# EAGLE board Micro-OLED-Breakout-Panel-v04 (EAGLE 6.6.0), part 1 of 3
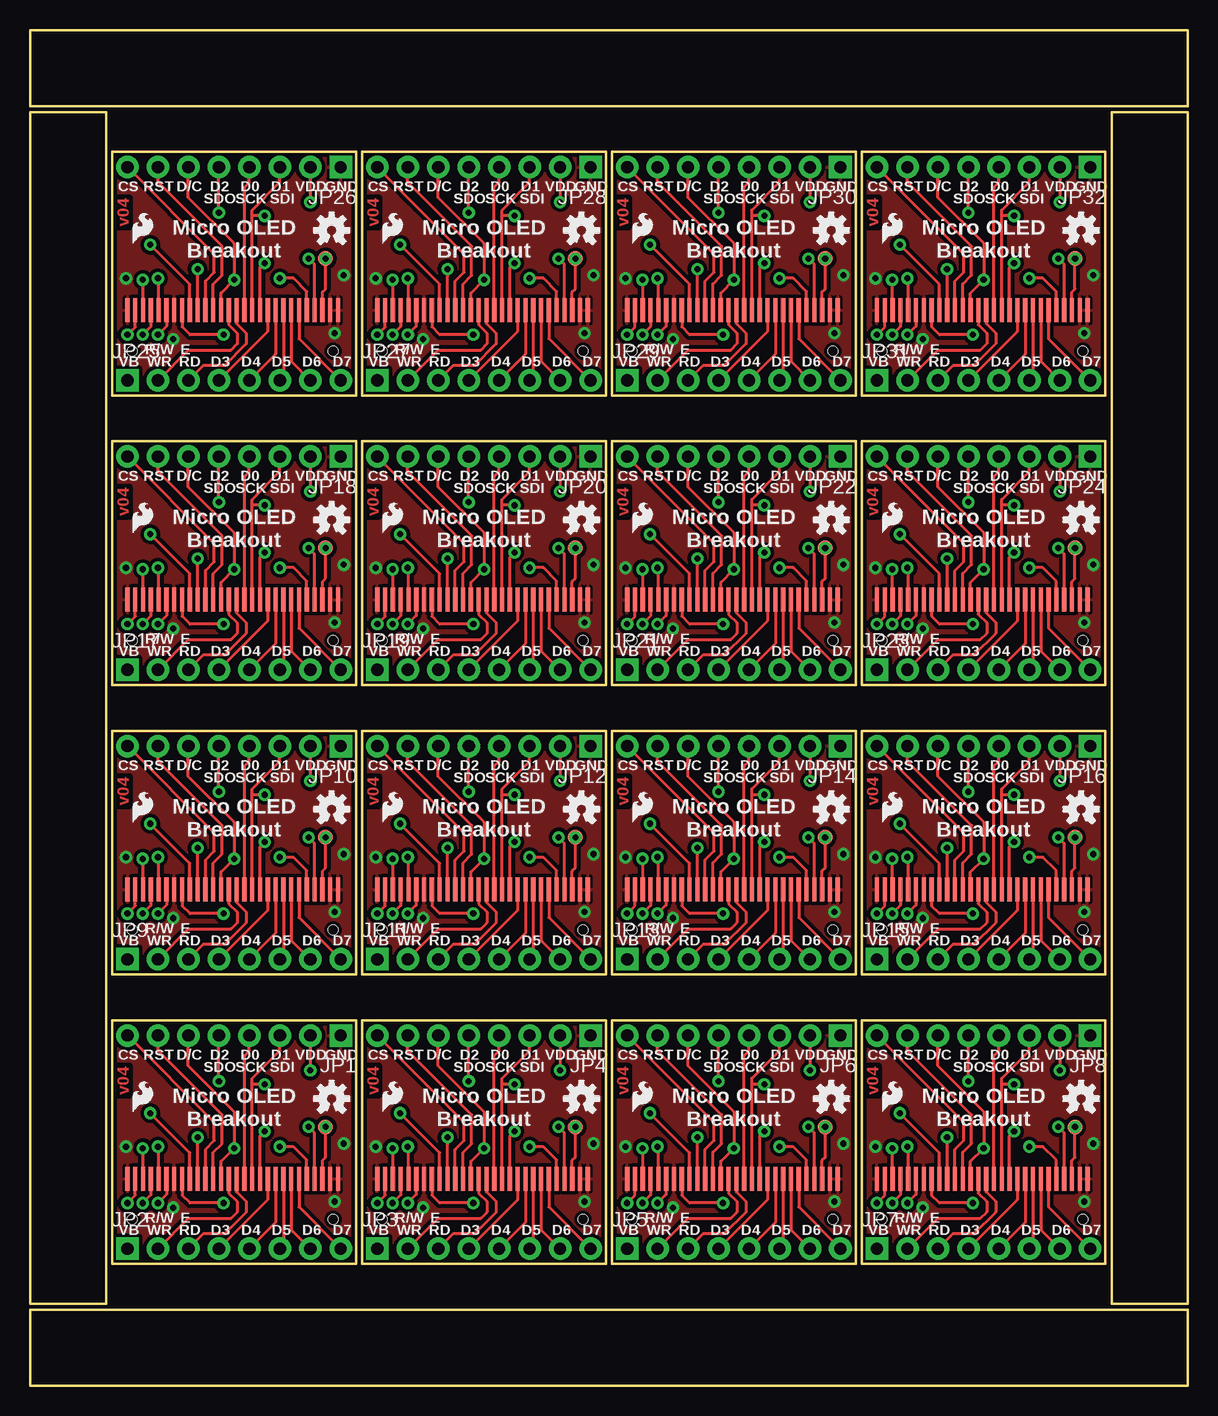
[diagram p0: board, top side]
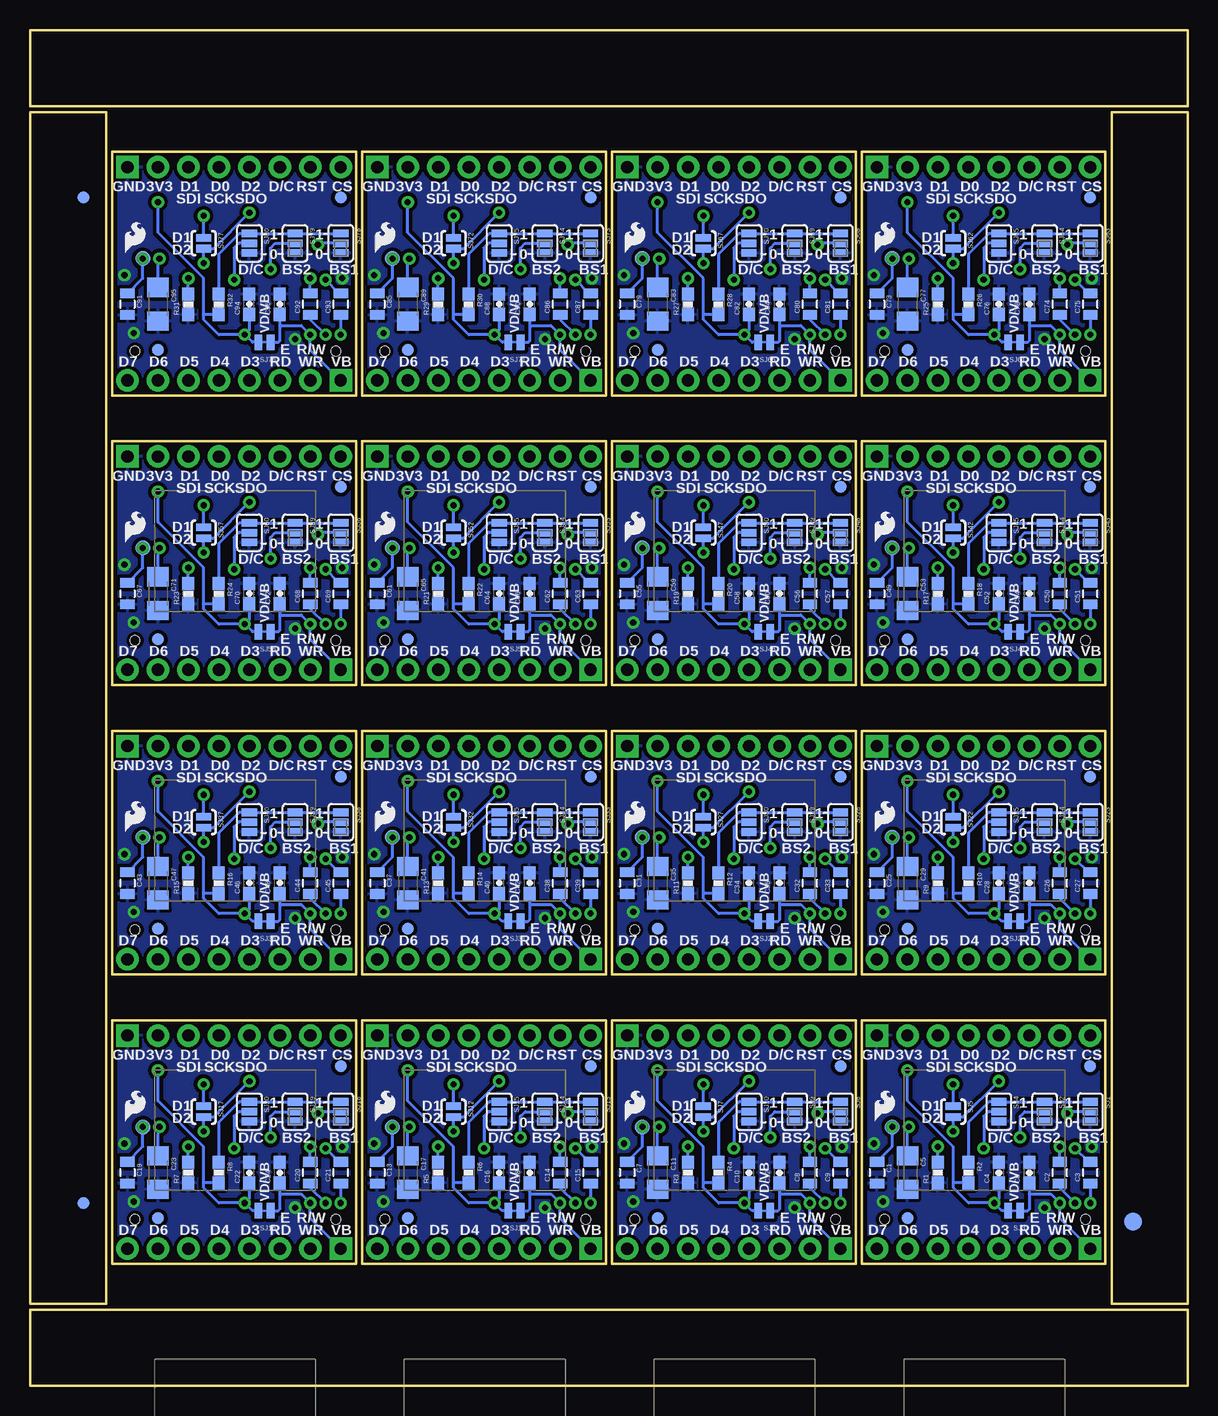
[diagram p1: board, bottom side, seen from below]

Size 96.52 x 113.03 mm. Coordinates in mm from the lower left corner, seen from the top.
Outline: 6.35,82.55 6.35,6.86 0,6.86 0,33.02
Outline: 79.25,0 0,0 0,6.35 29.72,6.35
Outline: 17.02,6.35 96.52,6.35 96.52,0 66.55,0
Outline: 96.52,82.55 96.52,6.86 90.17,6.86 90.17,33.02
Outline: 0,30.48 0,106.17 6.35,106.17 6.35,80.01
Outline: 79.25,106.68 0,106.68 0,113.03 29.72,113.03
Outline: 17.02,113.03 96.52,113.03 96.52,106.68 66.55,106.68
Outline: 90.17,30.48 90.17,106.17 96.52,106.17 96.52,80.01
Outline: 6.86,10.16 6.86,30.48 27.18,30.48 27.18,10.16 6.86,10.16
Outline: 27.69,10.16 27.69,30.48 48.01,30.48 48.01,10.16 27.69,10.16
Outline: 48.51,10.16 48.51,30.48 68.83,30.48 68.83,10.16 48.51,10.16
Outline: 69.34,10.16 69.34,30.48 89.66,30.48 89.66,10.16 69.34,10.16
Outline: 6.86,34.29 6.86,54.61 27.18,54.61 27.18,34.29 6.86,34.29
Outline: 27.69,34.29 27.69,54.61 48.01,54.61 48.01,34.29 27.69,34.29
Outline: 48.51,34.29 48.51,54.61 68.83,54.61 68.83,34.29 48.51,34.29
Outline: 69.34,34.29 69.34,54.61 89.66,54.61 89.66,34.29 69.34,34.29
Outline: 6.86,58.42 6.86,78.74 27.18,78.74 27.18,58.42 6.86,58.42
Outline: 27.69,58.42 27.69,78.74 48.01,78.74 48.01,58.42 27.69,58.42
Outline: 48.51,58.42 48.51,78.74 68.83,78.74 68.83,58.42 48.51,58.42
Outline: 69.34,58.42 69.34,78.74 89.66,78.74 89.66,58.42 69.34,58.42
Outline: 6.86,82.55 6.86,102.87 27.18,102.87 27.18,82.55 6.86,82.55
Outline: 27.69,82.55 27.69,102.87 48.01,102.87 48.01,82.55 27.69,82.55
Outline: 48.51,82.55 48.51,102.87 68.83,102.87 68.83,82.55 48.51,82.55
Outline: 69.34,82.55 69.34,102.87 89.66,102.87 89.66,82.55 69.34,82.55
Copper layers (1*16): Top 0.035mm / dielectric 1.5mm / Bottom 0.035mm
Design rules "SparkFun-2-layer": minimum track width 7mil, minimum drill 15mil, track to track 8mil, track to pad 8mil, pad to pad 8mil, via to via 8mil, smd to smd 8mil, copper to edge 8mil, drill to drill 8mil, minimum pad ring 12mil, minimum via ring 10mil, stop-mask expansion 4mil, vias tented up to drill 20mil, thermal gap 10mil

## Footprints (pad centres in the part's own frame; a part is rotated, then mirrored left to right if it is on the bottom)
0805 = smd 0.8 x 1.2: 1 -0.9,0; 2 0.9,0
0603-CAP = smd 1.1 x 1: 1 -0.85,0; 2 0.85,0
1206 = smd 1.6 x 1.8: 1 -1.4,0; 2 1.4,0
FIDUCIAL-1.5X3 = smd 1.5 x 1.5: 1 0,0
FIDUCIAL-1X2 = smd 1 x 1: 1 0,0
1X08_PIN1_NO_SILK = drill 1.016 pad 1.88 square: 1 0,0 | drill 1.016 pad 1.88: 2 2.54,0; 3 5.08,0; 4 7.62,0; 5 10.16,0; 6 12.7,0; 7 15.24,0; 8 17.78,0
OLED-0.66-64X48 = smd 0.35 x 2: 1 0,0; 2 0.65,0; 3 1.3,0; 4 1.95,0; 5 2.6,0; 6 3.25,0; 7 3.9,0; 8 4.55,0; 9 5.2,0; 10 5.85,0; 11 6.5,0; 12 7.15,0; 13 7.8,0; 14 8.45,0; 15 9.1,0; 16 9.75,0; 17 10.4,0; 18 11.05,0; 19 11.7,0; 20 12.35,0; 21 13,0; 22 13.65,0; 23 14.3,0; 24 14.95,0; 25 15.6,0; 26 16.25,0; 27 16.9,0; 28 17.55,0 | hole 0.8: 17.15,-3.4; 0.4,-3.4
0603-RES = smd 1.1 x 1: 1 -0.85,0; 2 0.85,0
PAD-JUMPER-3-2OF3_NC_BY_PASTE_YES_SILK_FULL_BOX = smd 0.635 x 1.27: 1 -0.813,0; 2 0,0; 3 0.813,0
PAD-JUMPER-2-NC_BY_TRACE_NO_SILK = smd 0.635 x 1.27: 1 -0.508,0; 2 0.508,0
PAD-JUMPER-3-NO-TIGHT = smd 0.635 x 1.27: 1 -0.813,0; 2 0,0; 3 0.813,0
PAD-JUMPER-2-NO_YES_SILK = smd 0.635 x 1.27: 1 -0.45,0; 2 0.45,0
PAD.03X.05 = smd 1.27 x 1.27: P$1 0,0

## Placement (x,y rotation side)
C1  2.2uF  [0805]  25.91,17.78 270 bottom
C2  1uF X5R  [0805]  10.67,17.78 90 bottom
C3  1uF X5R  [0805]  8.13,17.78 90 bottom
C4  1uF  [0603-CAP]  15.75,17.78 90 bottom
C5  4.7uF/16V  [1206]  23.37,17.78 270 bottom
C6  1uF  [0603-CAP]  13.21,17.78 90 bottom
C7  2.2uF  [0805]  46.74,17.78 270 bottom
C8  1uF X5R  [0805]  31.5,17.78 90 bottom
C9  1uF X5R  [0805]  28.96,17.78 90 bottom
C10  1uF  [0603-CAP]  36.58,17.78 90 bottom
C11  4.7uF/16V  [1206]  44.2,17.78 270 bottom
C12  1uF  [0603-CAP]  34.04,17.78 90 bottom
C13  2.2uF  [0805]  67.56,17.78 270 bottom
C14  1uF X5R  [0805]  52.32,17.78 90 bottom
C15  1uF X5R  [0805]  49.78,17.78 90 bottom
C16  1uF  [0603-CAP]  57.4,17.78 90 bottom
C17  4.7uF/16V  [1206]  65.02,17.78 270 bottom
C18  1uF  [0603-CAP]  54.86,17.78 90 bottom
C19  2.2uF  [0805]  88.39,17.78 270 bottom
C20  1uF X5R  [0805]  73.15,17.78 90 bottom
C21  1uF X5R  [0805]  70.61,17.78 90 bottom
C22  1uF  [0603-CAP]  78.23,17.78 90 bottom
C23  4.7uF/16V  [1206]  85.85,17.78 270 bottom
C24  1uF  [0603-CAP]  75.69,17.78 90 bottom
C25  2.2uF  [0805]  25.91,41.91 270 bottom
C26  1uF X5R  [0805]  10.67,41.91 90 bottom
C27  1uF X5R  [0805]  8.13,41.91 90 bottom
C28  1uF  [0603-CAP]  15.75,41.91 90 bottom
C29  4.7uF/16V  [1206]  23.37,41.91 270 bottom
C30  1uF  [0603-CAP]  13.21,41.91 90 bottom
C31  2.2uF  [0805]  46.74,41.91 270 bottom
C32  1uF X5R  [0805]  31.5,41.91 90 bottom
C33  1uF X5R  [0805]  28.96,41.91 90 bottom
C34  1uF  [0603-CAP]  36.58,41.91 90 bottom
C35  4.7uF/16V  [1206]  44.2,41.91 270 bottom
C36  1uF  [0603-CAP]  34.04,41.91 90 bottom
C37  2.2uF  [0805]  67.56,41.91 270 bottom
C38  1uF X5R  [0805]  52.32,41.91 90 bottom
C39  1uF X5R  [0805]  49.78,41.91 90 bottom
C40  1uF  [0603-CAP]  57.4,41.91 90 bottom
C41  4.7uF/16V  [1206]  65.02,41.91 270 bottom
C42  1uF  [0603-CAP]  54.86,41.91 90 bottom
C43  2.2uF  [0805]  88.39,41.91 270 bottom
C44  1uF X5R  [0805]  73.15,41.91 90 bottom
C45  1uF X5R  [0805]  70.61,41.91 90 bottom
C46  1uF  [0603-CAP]  78.23,41.91 90 bottom
C47  4.7uF/16V  [1206]  85.85,41.91 270 bottom
C48  1uF  [0603-CAP]  75.69,41.91 90 bottom
C49  2.2uF  [0805]  25.91,66.04 270 bottom
C50  1uF X5R  [0805]  10.67,66.04 90 bottom
C51  1uF X5R  [0805]  8.13,66.04 90 bottom
C52  1uF  [0603-CAP]  15.75,66.04 90 bottom
C53  4.7uF/16V  [1206]  23.37,66.04 270 bottom
C54  1uF  [0603-CAP]  13.21,66.04 90 bottom
C55  2.2uF  [0805]  46.74,66.04 270 bottom
C56  1uF X5R  [0805]  31.5,66.04 90 bottom
C57  1uF X5R  [0805]  28.96,66.04 90 bottom
C58  1uF  [0603-CAP]  36.58,66.04 90 bottom
C59  4.7uF/16V  [1206]  44.2,66.04 270 bottom
C60  1uF  [0603-CAP]  34.04,66.04 90 bottom
C61  2.2uF  [0805]  67.56,66.04 270 bottom
C62  1uF X5R  [0805]  52.32,66.04 90 bottom
C63  1uF X5R  [0805]  49.78,66.04 90 bottom
C64  1uF  [0603-CAP]  57.4,66.04 90 bottom
C65  4.7uF/16V  [1206]  65.02,66.04 270 bottom
C66  1uF  [0603-CAP]  54.86,66.04 90 bottom
C67  2.2uF  [0805]  88.39,66.04 270 bottom
C68  1uF X5R  [0805]  73.15,66.04 90 bottom
C69  1uF X5R  [0805]  70.61,66.04 90 bottom
C70  1uF  [0603-CAP]  78.23,66.04 90 bottom
C71  4.7uF/16V  [1206]  85.85,66.04 270 bottom
C72  1uF  [0603-CAP]  75.69,66.04 90 bottom
C73  2.2uF  [0805]  25.91,90.17 270 bottom
C74  1uF X5R  [0805]  10.67,90.17 90 bottom
C75  1uF X5R  [0805]  8.13,90.17 90 bottom
C76  1uF  [0603-CAP]  15.75,90.17 90 bottom
C77  4.7uF/16V  [1206]  23.37,90.17 270 bottom
C78  1uF  [0603-CAP]  13.21,90.17 90 bottom
C79  2.2uF  [0805]  46.74,90.17 270 bottom
C80  1uF X5R  [0805]  31.5,90.17 90 bottom
C81  1uF X5R  [0805]  28.96,90.17 90 bottom
C82  1uF  [0603-CAP]  36.58,90.17 90 bottom
C83  4.7uF/16V  [1206]  44.2,90.17 270 bottom
C84  1uF  [0603-CAP]  34.04,90.17 90 bottom
C85  2.2uF  [0805]  67.56,90.17 270 bottom
C86  1uF X5R  [0805]  52.32,90.17 90 bottom
C87  1uF X5R  [0805]  49.78,90.17 90 bottom
C88  1uF  [0603-CAP]  57.4,90.17 90 bottom
C89  4.7uF/16V  [1206]  65.02,90.17 270 bottom
C90  1uF  [0603-CAP]  54.86,90.17 90 bottom
C91  2.2uF  [0805]  88.39,90.17 270 bottom
C92  1uF X5R  [0805]  73.15,90.17 90 bottom
C93  1uF X5R  [0805]  70.61,90.17 90 bottom
C94  1uF  [0603-CAP]  78.23,90.17 90 bottom
C95  4.7uF/16V  [1206]  85.85,90.17 270 bottom
C96  1uF  [0603-CAP]  75.69,90.17 90 bottom
E$1  [FIDUCIAL-1.5X3]  4.57,13.72 0 bottom
E$4  [FIDUCIAL-1X2]  92.08,15.24 0 bottom
E$8  [FIDUCIAL-1X2]  92.08,99.06 180 bottom
FID1  FIDUCIAL1X2  [FIDUCIAL-1X2]  23.37,13.97 0 bottom
FID2  FIDUCIAL1X2  [FIDUCIAL-1X2]  8.13,26.67 0 bottom
FID3  FIDUCIAL1X2  [FIDUCIAL-1X2]  44.2,13.97 0 bottom
FID4  FIDUCIAL1X2  [FIDUCIAL-1X2]  28.96,26.67 0 bottom
FID5  FIDUCIAL1X2  [FIDUCIAL-1X2]  65.02,13.97 0 bottom
FID6  FIDUCIAL1X2  [FIDUCIAL-1X2]  49.78,26.67 0 bottom
FID7  FIDUCIAL1X2  [FIDUCIAL-1X2]  85.85,13.97 0 bottom
FID8  FIDUCIAL1X2  [FIDUCIAL-1X2]  70.61,26.67 0 bottom
FID9  FIDUCIAL1X2  [FIDUCIAL-1X2]  23.37,38.1 0 bottom
FID10  FIDUCIAL1X2  [FIDUCIAL-1X2]  8.13,50.8 0 bottom
FID11  FIDUCIAL1X2  [FIDUCIAL-1X2]  44.2,38.1 0 bottom
FID12  FIDUCIAL1X2  [FIDUCIAL-1X2]  28.96,50.8 0 bottom
FID13  FIDUCIAL1X2  [FIDUCIAL-1X2]  65.02,38.1 0 bottom
FID14  FIDUCIAL1X2  [FIDUCIAL-1X2]  49.78,50.8 0 bottom
FID15  FIDUCIAL1X2  [FIDUCIAL-1X2]  85.85,38.1 0 bottom
FID16  FIDUCIAL1X2  [FIDUCIAL-1X2]  70.61,50.8 0 bottom
FID17  FIDUCIAL1X2  [FIDUCIAL-1X2]  23.37,62.23 0 bottom
FID18  FIDUCIAL1X2  [FIDUCIAL-1X2]  8.13,74.93 0 bottom
FID19  FIDUCIAL1X2  [FIDUCIAL-1X2]  44.2,62.23 0 bottom
FID20  FIDUCIAL1X2  [FIDUCIAL-1X2]  28.96,74.93 0 bottom
FID21  FIDUCIAL1X2  [FIDUCIAL-1X2]  65.02,62.23 0 bottom
FID22  FIDUCIAL1X2  [FIDUCIAL-1X2]  49.78,74.93 0 bottom
FID23  FIDUCIAL1X2  [FIDUCIAL-1X2]  85.85,62.23 0 bottom
FID24  FIDUCIAL1X2  [FIDUCIAL-1X2]  70.61,74.93 0 bottom
FID25  FIDUCIAL1X2  [FIDUCIAL-1X2]  23.37,86.36 0 bottom
FID26  FIDUCIAL1X2  [FIDUCIAL-1X2]  8.13,99.06 0 bottom
FID27  FIDUCIAL1X2  [FIDUCIAL-1X2]  44.2,86.36 0 bottom
FID28  FIDUCIAL1X2  [FIDUCIAL-1X2]  28.96,99.06 0 bottom
FID29  FIDUCIAL1X2  [FIDUCIAL-1X2]  65.02,86.36 0 bottom
FID30  FIDUCIAL1X2  [FIDUCIAL-1X2]  49.78,99.06 0 bottom
FID31  FIDUCIAL1X2  [FIDUCIAL-1X2]  85.85,86.36 0 bottom
FID32  FIDUCIAL1X2  [FIDUCIAL-1X2]  70.61,99.06 0 bottom
JP1  [1X08_PIN1_NO_SILK]  25.91,29.21 180 top
JP2  [1X08_PIN1_NO_SILK]  8.13,11.43 0 top
JP3  [1X08_PIN1_NO_SILK]  28.96,11.43 0 top
JP4  [1X08_PIN1_NO_SILK]  46.74,29.21 180 top
JP5  [1X08_PIN1_NO_SILK]  49.78,11.43 0 top
JP6  [1X08_PIN1_NO_SILK]  67.56,29.21 180 top
JP7  [1X08_PIN1_NO_SILK]  70.61,11.43 0 top
JP8  [1X08_PIN1_NO_SILK]  88.39,29.21 180 top
JP9  [1X08_PIN1_NO_SILK]  8.13,35.56 0 top
JP10  [1X08_PIN1_NO_SILK]  25.91,53.34 180 top
JP11  [1X08_PIN1_NO_SILK]  28.96,35.56 0 top
JP12  [1X08_PIN1_NO_SILK]  46.74,53.34 180 top
JP13  [1X08_PIN1_NO_SILK]  49.78,35.56 0 top
JP14  [1X08_PIN1_NO_SILK]  67.56,53.34 180 top
JP15  [1X08_PIN1_NO_SILK]  70.61,35.56 0 top
JP16  [1X08_PIN1_NO_SILK]  88.39,53.34 180 top
JP17  [1X08_PIN1_NO_SILK]  8.13,59.69 0 top
JP18  [1X08_PIN1_NO_SILK]  25.91,77.47 180 top
JP19  [1X08_PIN1_NO_SILK]  28.96,59.69 0 top
JP20  [1X08_PIN1_NO_SILK]  46.74,77.47 180 top
JP21  [1X08_PIN1_NO_SILK]  49.78,59.69 0 top
JP22  [1X08_PIN1_NO_SILK]  67.56,77.47 180 top
JP23  [1X08_PIN1_NO_SILK]  70.61,59.69 0 top
JP24  [1X08_PIN1_NO_SILK]  88.39,77.47 180 top
JP25  [1X08_PIN1_NO_SILK]  8.13,83.82 0 top
JP26  [1X08_PIN1_NO_SILK]  25.91,101.6 180 top
JP27  [1X08_PIN1_NO_SILK]  28.96,83.82 0 top
JP28  [1X08_PIN1_NO_SILK]  46.74,101.6 180 top
JP29  [1X08_PIN1_NO_SILK]  49.78,83.82 0 top
JP30  [1X08_PIN1_NO_SILK]  67.56,101.6 180 top
JP31  [1X08_PIN1_NO_SILK]  70.61,83.82 0 top
JP32  [1X08_PIN1_NO_SILK]  88.39,101.6 180 top
LOGO1  SFE_LOGO_FLAME.1_INCH  [SFE_LOGO_FLAME_.1]  29.08,22.48 0 top
LOGO2  SFE_LOGO_FLAME.1_INCH  [SFE_LOGO_FLAME_.1]  8.26,22.48 0 top
LOGO3  OSHW-LOGOS  [OSHW-LOGO-S]  25.15,23.94 0 top
LOGO4  SFE_LOGO_FLAME.1_INCH  [SFE_LOGO_FLAME_.1]  26.42,21.72 0 bottom
LOGO5  SFE_LOGO_FLAME.1_INCH  [SFE_LOGO_FLAME_.1]  47.24,21.72 0 bottom
LOGO6  OSHW-LOGOS  [OSHW-LOGO-S]  45.97,23.94 0 top
LOGO7  SFE_LOGO_FLAME.1_INCH  [SFE_LOGO_FLAME_.1]  49.91,22.48 0 top
LOGO8  SFE_LOGO_FLAME.1_INCH  [SFE_LOGO_FLAME_.1]  68.07,21.72 0 bottom
LOGO9  OSHW-LOGOS  [OSHW-LOGO-S]  66.8,23.94 0 top
LOGO10  SFE_LOGO_FLAME.1_INCH  [SFE_LOGO_FLAME_.1]  70.74,22.48 0 top
LOGO11  SFE_LOGO_FLAME.1_INCH  [SFE_LOGO_FLAME_.1]  88.9,21.72 0 bottom
LOGO12  OSHW-LOGOS  [OSHW-LOGO-S]  87.63,23.94 0 top
LOGO13  SFE_LOGO_FLAME.1_INCH  [SFE_LOGO_FLAME_.1]  8.26,46.61 0 top
LOGO14  SFE_LOGO_FLAME.1_INCH  [SFE_LOGO_FLAME_.1]  26.42,45.85 0 bottom
LOGO15  OSHW-LOGOS  [OSHW-LOGO-S]  25.15,48.07 0 top
LOGO16  SFE_LOGO_FLAME.1_INCH  [SFE_LOGO_FLAME_.1]  29.08,46.61 0 top
LOGO17  SFE_LOGO_FLAME.1_INCH  [SFE_LOGO_FLAME_.1]  47.24,45.85 0 bottom
LOGO18  OSHW-LOGOS  [OSHW-LOGO-S]  45.97,48.07 0 top
LOGO19  SFE_LOGO_FLAME.1_INCH  [SFE_LOGO_FLAME_.1]  49.91,46.61 0 top
LOGO20  SFE_LOGO_FLAME.1_INCH  [SFE_LOGO_FLAME_.1]  68.07,45.85 0 bottom
LOGO21  OSHW-LOGOS  [OSHW-LOGO-S]  66.8,48.07 0 top
LOGO22  SFE_LOGO_FLAME.1_INCH  [SFE_LOGO_FLAME_.1]  70.74,46.61 0 top
LOGO23  SFE_LOGO_FLAME.1_INCH  [SFE_LOGO_FLAME_.1]  88.9,45.85 0 bottom
LOGO24  OSHW-LOGOS  [OSHW-LOGO-S]  87.63,48.07 0 top
LOGO25  SFE_LOGO_FLAME.1_INCH  [SFE_LOGO_FLAME_.1]  8.26,70.74 0 top
LOGO26  SFE_LOGO_FLAME.1_INCH  [SFE_LOGO_FLAME_.1]  26.42,69.98 0 bottom
LOGO27  OSHW-LOGOS  [OSHW-LOGO-S]  25.15,72.2 0 top
LOGO28  SFE_LOGO_FLAME.1_INCH  [SFE_LOGO_FLAME_.1]  29.08,70.74 0 top
LOGO29  SFE_LOGO_FLAME.1_INCH  [SFE_LOGO_FLAME_.1]  47.24,69.98 0 bottom
LOGO30  OSHW-LOGOS  [OSHW-LOGO-S]  45.97,72.2 0 top
LOGO31  SFE_LOGO_FLAME.1_INCH  [SFE_LOGO_FLAME_.1]  49.91,70.74 0 top
LOGO32  SFE_LOGO_FLAME.1_INCH  [SFE_LOGO_FLAME_.1]  68.07,69.98 0 bottom
LOGO33  OSHW-LOGOS  [OSHW-LOGO-S]  66.8,72.2 0 top
LOGO34  SFE_LOGO_FLAME.1_INCH  [SFE_LOGO_FLAME_.1]  70.74,70.74 0 top
LOGO35  SFE_LOGO_FLAME.1_INCH  [SFE_LOGO_FLAME_.1]  88.9,69.98 0 bottom
LOGO36  OSHW-LOGOS  [OSHW-LOGO-S]  87.63,72.2 0 top
LOGO37  SFE_LOGO_FLAME.1_INCH  [SFE_LOGO_FLAME_.1]  8.26,94.87 0 top
LOGO38  SFE_LOGO_FLAME.1_INCH  [SFE_LOGO_FLAME_.1]  26.42,94.11 0 bottom
LOGO39  OSHW-LOGOS  [OSHW-LOGO-S]  25.15,96.33 0 top
LOGO40  SFE_LOGO_FLAME.1_INCH  [SFE_LOGO_FLAME_.1]  29.08,94.87 0 top
LOGO41  SFE_LOGO_FLAME.1_INCH  [SFE_LOGO_FLAME_.1]  47.24,94.11 0 bottom
LOGO42  OSHW-LOGOS  [OSHW-LOGO-S]  45.97,96.33 0 top
LOGO43  SFE_LOGO_FLAME.1_INCH  [SFE_LOGO_FLAME_.1]  49.91,94.87 0 top
LOGO44  SFE_LOGO_FLAME.1_INCH  [SFE_LOGO_FLAME_.1]  68.07,94.11 0 bottom
LOGO45  OSHW-LOGOS  [OSHW-LOGO-S]  66.8,96.33 0 top
LOGO46  SFE_LOGO_FLAME.1_INCH  [SFE_LOGO_FLAME_.1]  70.74,94.87 0 top
LOGO47  SFE_LOGO_FLAME.1_INCH  [SFE_LOGO_FLAME_.1]  88.9,94.11 0 bottom
LOGO48  OSHW-LOGOS  [OSHW-LOGO-S]  87.63,96.33 0 top
OLED1  OLED0.66  [OLED-0.66-64X48]  8.13,17.27 0 top
OLED2  OLED0.66  [OLED-0.66-64X48]  28.96,17.27 0 top
OLED3  OLED0.66  [OLED-0.66-64X48]  49.78,17.27 0 top
OLED4  OLED0.66  [OLED-0.66-64X48]  70.61,17.27 0 top
OLED5  OLED0.66  [OLED-0.66-64X48]  8.13,41.4 0 top
OLED6  OLED0.66  [OLED-0.66-64X48]  28.96,41.4 0 top
OLED7  OLED0.66  [OLED-0.66-64X48]  49.78,41.4 0 top
OLED8  OLED0.66  [OLED-0.66-64X48]  70.61,41.4 0 top
OLED9  OLED0.66  [OLED-0.66-64X48]  8.13,65.53 0 top
OLED10  OLED0.66  [OLED-0.66-64X48]  28.96,65.53 0 top
OLED11  OLED0.66  [OLED-0.66-64X48]  49.78,65.53 0 top
OLED12  OLED0.66  [OLED-0.66-64X48]  70.61,65.53 0 top
OLED13  OLED0.66  [OLED-0.66-64X48]  8.13,89.66 0 top
OLED14  OLED0.66  [OLED-0.66-64X48]  28.96,89.66 0 top
OLED15  OLED0.66  [OLED-0.66-64X48]  49.78,89.66 0 top
OLED16  OLED0.66  [OLED-0.66-64X48]  70.61,89.66 0 top
R1  390k  [0603-RES]  20.83,17.78 90 bottom
R2  10k  [0603-RES]  18.29,17.78 270 bottom
R3  390k  [0603-RES]  41.66,17.78 90 bottom
R4  10k  [0603-RES]  39.12,17.78 270 bottom
R5  390k  [0603-RES]  62.48,17.78 90 bottom
R6  10k  [0603-RES]  59.94,17.78 270 bottom
R7  390k  [0603-RES]  83.31,17.78 90 bottom
R8  10k  [0603-RES]  80.77,17.78 270 bottom
R9  390k  [0603-RES]  20.83,41.91 90 bottom
R10  10k  [0603-RES]  18.29,41.91 270 bottom
R11  390k  [0603-RES]  41.66,41.91 90 bottom
R12  10k  [0603-RES]  39.12,41.91 270 bottom
R13  390k  [0603-RES]  62.48,41.91 90 bottom
R14  10k  [0603-RES]  59.94,41.91 270 bottom
R15  390k  [0603-RES]  83.31,41.91 90 bottom
R16  10k  [0603-RES]  80.77,41.91 270 bottom
R17  390k  [0603-RES]  20.83,66.04 90 bottom
R18  10k  [0603-RES]  18.29,66.04 270 bottom
R19  390k  [0603-RES]  41.66,66.04 90 bottom
R20  10k  [0603-RES]  39.12,66.04 270 bottom
R21  390k  [0603-RES]  62.48,66.04 90 bottom
R22  10k  [0603-RES]  59.94,66.04 270 bottom
R23  390k  [0603-RES]  83.31,66.04 90 bottom
R24  10k  [0603-RES]  80.77,66.04 270 bottom
R25  390k  [0603-RES]  20.83,90.17 90 bottom
R26  10k  [0603-RES]  18.29,90.17 270 bottom
R27  390k  [0603-RES]  41.66,90.17 90 bottom
R28  10k  [0603-RES]  39.12,90.17 270 bottom
R29  390k  [0603-RES]  62.48,90.17 90 bottom
R30  10k  [0603-RES]  59.94,90.17 270 bottom
R31  390k  [0603-RES]  83.31,90.17 90 bottom
R32  10k  [0603-RES]  80.77,90.17 270 bottom
SJ1  BS1  [PAD-JUMPER-3-2OF3_NC_BY_PASTE_YES_SILK_FULL_BOX]  8.13,22.86 270 bottom
SJ2  BS2  [PAD-JUMPER-3-2OF3_NC_BY_PASTE_YES_SILK_FULL_BOX]  11.94,22.86 270 bottom
SJ3  [PAD-JUMPER-2-NC_BY_TRACE_NO_SILK]  14.48,14.61 180 bottom
SJ4  [PAD-JUMPER-3-NO-TIGHT]  15.75,22.86 270 bottom
SJ5  [PAD-JUMPER-2-NO_YES_SILK]  19.56,22.86 270 bottom
SJ6  [PAD-JUMPER-2-NC_BY_TRACE_NO_SILK]  35.31,14.61 180 bottom
SJ7  [PAD-JUMPER-2-NO_YES_SILK]  40.39,22.86 270 bottom
SJ8  BS1  [PAD-JUMPER-3-2OF3_NC_BY_PASTE_YES_SILK_FULL_BOX]  28.96,22.86 270 bottom
SJ9  BS2  [PAD-JUMPER-3-2OF3_NC_BY_PASTE_YES_SILK_FULL_BOX]  32.77,22.86 270 bottom
SJ10  [PAD-JUMPER-3-NO-TIGHT]  36.58,22.86 270 bottom
SJ11  [PAD-JUMPER-2-NC_BY_TRACE_NO_SILK]  56.13,14.61 180 bottom
SJ12  [PAD-JUMPER-2-NO_YES_SILK]  61.21,22.86 270 bottom
SJ13  BS1  [PAD-JUMPER-3-2OF3_NC_BY_PASTE_YES_SILK_FULL_BOX]  49.78,22.86 270 bottom
SJ14  BS2  [PAD-JUMPER-3-2OF3_NC_BY_PASTE_YES_SILK_FULL_BOX]  53.59,22.86 270 bottom
SJ15  [PAD-JUMPER-3-NO-TIGHT]  57.4,22.86 270 bottom
SJ16  [PAD-JUMPER-2-NC_BY_TRACE_NO_SILK]  76.96,14.61 180 bottom
SJ17  [PAD-JUMPER-2-NO_YES_SILK]  82.04,22.86 270 bottom
SJ18  BS1  [PAD-JUMPER-3-2OF3_NC_BY_PASTE_YES_SILK_FULL_BOX]  70.61,22.86 270 bottom
SJ19  BS2  [PAD-JUMPER-3-2OF3_NC_BY_PASTE_YES_SILK_FULL_BOX]  74.42,22.86 270 bottom
SJ20  [PAD-JUMPER-3-NO-TIGHT]  78.23,22.86 270 bottom
SJ21  [PAD-JUMPER-2-NC_BY_TRACE_NO_SILK]  14.48,38.73 180 bottom
SJ22  [PAD-JUMPER-2-NO_YES_SILK]  19.56,46.99 270 bottom
SJ23  BS1  [PAD-JUMPER-3-2OF3_NC_BY_PASTE_YES_SILK_FULL_BOX]  8.13,46.99 270 bottom
SJ24  BS2  [PAD-JUMPER-3-2OF3_NC_BY_PASTE_YES_SILK_FULL_BOX]  11.94,46.99 270 bottom
SJ25  [PAD-JUMPER-3-NO-TIGHT]  15.75,46.99 270 bottom
SJ26  [PAD-JUMPER-2-NC_BY_TRACE_NO_SILK]  35.31,38.73 180 bottom
SJ27  [PAD-JUMPER-2-NO_YES_SILK]  40.39,46.99 270 bottom
SJ28  BS1  [PAD-JUMPER-3-2OF3_NC_BY_PASTE_YES_SILK_FULL_BOX]  28.96,46.99 270 bottom
SJ29  BS2  [PAD-JUMPER-3-2OF3_NC_BY_PASTE_YES_SILK_FULL_BOX]  32.77,46.99 270 bottom
SJ30  [PAD-JUMPER-3-NO-TIGHT]  36.58,46.99 270 bottom
SJ31  [PAD-JUMPER-2-NC_BY_TRACE_NO_SILK]  56.13,38.73 180 bottom
SJ32  [PAD-JUMPER-2-NO_YES_SILK]  61.21,46.99 270 bottom
SJ33  BS1  [PAD-JUMPER-3-2OF3_NC_BY_PASTE_YES_SILK_FULL_BOX]  49.78,46.99 270 bottom
SJ34  BS2  [PAD-JUMPER-3-2OF3_NC_BY_PASTE_YES_SILK_FULL_BOX]  53.59,46.99 270 bottom
SJ35  [PAD-JUMPER-3-NO-TIGHT]  57.4,46.99 270 bottom
SJ36  [PAD-JUMPER-2-NC_BY_TRACE_NO_SILK]  76.96,38.73 180 bottom
SJ37  [PAD-JUMPER-2-NO_YES_SILK]  82.04,46.99 270 bottom
SJ38  BS1  [PAD-JUMPER-3-2OF3_NC_BY_PASTE_YES_SILK_FULL_BOX]  70.61,46.99 270 bottom
SJ39  BS2  [PAD-JUMPER-3-2OF3_NC_BY_PASTE_YES_SILK_FULL_BOX]  74.42,46.99 270 bottom
SJ40  [PAD-JUMPER-3-NO-TIGHT]  78.23,46.99 270 bottom
SJ41  [PAD-JUMPER-2-NC_BY_TRACE_NO_SILK]  14.48,62.87 180 bottom
SJ42  [PAD-JUMPER-2-NO_YES_SILK]  19.56,71.12 270 bottom
SJ43  BS1  [PAD-JUMPER-3-2OF3_NC_BY_PASTE_YES_SILK_FULL_BOX]  8.13,71.12 270 bottom
SJ44  BS2  [PAD-JUMPER-3-2OF3_NC_BY_PASTE_YES_SILK_FULL_BOX]  11.94,71.12 270 bottom
SJ45  [PAD-JUMPER-3-NO-TIGHT]  15.75,71.12 270 bottom
SJ46  [PAD-JUMPER-2-NC_BY_TRACE_NO_SILK]  35.31,62.87 180 bottom
SJ47  [PAD-JUMPER-2-NO_YES_SILK]  40.39,71.12 270 bottom
SJ48  BS1  [PAD-JUMPER-3-2OF3_NC_BY_PASTE_YES_SILK_FULL_BOX]  28.96,71.12 270 bottom
SJ49  BS2  [PAD-JUMPER-3-2OF3_NC_BY_PASTE_YES_SILK_FULL_BOX]  32.77,71.12 270 bottom
SJ50  [PAD-JUMPER-3-NO-TIGHT]  36.58,71.12 270 bottom
SJ51  [PAD-JUMPER-2-NC_BY_TRACE_NO_SILK]  56.13,62.87 180 bottom
SJ52  [PAD-JUMPER-2-NO_YES_SILK]  61.21,71.12 270 bottom
SJ53  BS1  [PAD-JUMPER-3-2OF3_NC_BY_PASTE_YES_SILK_FULL_BOX]  49.78,71.12 270 bottom
SJ54  BS2  [PAD-JUMPER-3-2OF3_NC_BY_PASTE_YES_SILK_FULL_BOX]  53.59,71.12 270 bottom
SJ55  [PAD-JUMPER-3-NO-TIGHT]  57.4,71.12 270 bottom
SJ56  [PAD-JUMPER-2-NC_BY_TRACE_NO_SILK]  76.96,62.87 180 bottom
SJ57  [PAD-JUMPER-2-NO_YES_SILK]  82.04,71.12 270 bottom
SJ58  BS1  [PAD-JUMPER-3-2OF3_NC_BY_PASTE_YES_SILK_FULL_BOX]  70.61,71.12 270 bottom
SJ59  BS2  [PAD-JUMPER-3-2OF3_NC_BY_PASTE_YES_SILK_FULL_BOX]  74.42,71.12 270 bottom
SJ60  [PAD-JUMPER-3-NO-TIGHT]  78.23,71.12 270 bottom
SJ61  [PAD-JUMPER-2-NC_BY_TRACE_NO_SILK]  14.48,87 180 bottom
SJ62  [PAD-JUMPER-2-NO_YES_SILK]  19.56,95.25 270 bottom
SJ63  BS1  [PAD-JUMPER-3-2OF3_NC_BY_PASTE_YES_SILK_FULL_BOX]  8.13,95.25 270 bottom
SJ64  BS2  [PAD-JUMPER-3-2OF3_NC_BY_PASTE_YES_SILK_FULL_BOX]  11.94,95.25 270 bottom
SJ65  [PAD-JUMPER-3-NO-TIGHT]  15.75,95.25 270 bottom
SJ66  [PAD-JUMPER-2-NC_BY_TRACE_NO_SILK]  35.31,87 180 bottom
SJ67  [PAD-JUMPER-2-NO_YES_SILK]  40.39,95.25 270 bottom
SJ68  BS1  [PAD-JUMPER-3-2OF3_NC_BY_PASTE_YES_SILK_FULL_BOX]  28.96,95.25 270 bottom
SJ69  BS2  [PAD-JUMPER-3-2OF3_NC_BY_PASTE_YES_SILK_FULL_BOX]  32.77,95.25 270 bottom
SJ70  [PAD-JUMPER-3-NO-TIGHT]  36.58,95.25 270 bottom
SJ71  [PAD-JUMPER-2-NC_BY_TRACE_NO_SILK]  56.13,87 180 bottom
SJ72  [PAD-JUMPER-2-NO_YES_SILK]  61.21,95.25 270 bottom
SJ73  BS1  [PAD-JUMPER-3-2OF3_NC_BY_PASTE_YES_SILK_FULL_BOX]  49.78,95.25 270 bottom
SJ74  BS2  [PAD-JUMPER-3-2OF3_NC_BY_PASTE_YES_SILK_FULL_BOX]  53.59,95.25 270 bottom
SJ75  [PAD-JUMPER-3-NO-TIGHT]  57.4,95.25 270 bottom
SJ76  [PAD-JUMPER-2-NC_BY_TRACE_NO_SILK]  76.96,87 180 bottom
SJ77  [PAD-JUMPER-2-NO_YES_SILK]  82.04,95.25 270 bottom
SJ78  BS1  [PAD-JUMPER-3-2OF3_NC_BY_PASTE_YES_SILK_FULL_BOX]  70.61,95.25 270 bottom
SJ79  BS2  [PAD-JUMPER-3-2OF3_NC_BY_PASTE_YES_SILK_FULL_BOX]  74.42,95.25 270 bottom
SJ80  [PAD-JUMPER-3-NO-TIGHT]  78.23,95.25 270 bottom
TP1  TEST-POINT3X5  [PAD.03X.05]  24.64,21.59 0 bottom
TP2  TEST-POINT3X5  [PAD.03X.05]  24.64,21.59 0 top
TP3  TEST-POINT3X5  [PAD.03X.05]  45.47,21.59 0 bottom
TP4  TEST-POINT3X5  [PAD.03X.05]  45.47,21.59 0 top
TP5  TEST-POINT3X5  [PAD.03X.05]  66.29,21.59 0 bottom
TP6  TEST-POINT3X5  [PAD.03X.05]  66.29,21.59 0 top
TP7  TEST-POINT3X5  [PAD.03X.05]  87.12,21.59 0 bottom
TP8  TEST-POINT3X5  [PAD.03X.05]  87.12,21.59 0 top
TP9  TEST-POINT3X5  [PAD.03X.05]  24.64,45.72 0 bottom
TP10  TEST-POINT3X5  [PAD.03X.05]  24.64,45.72 0 top
TP11  TEST-POINT3X5  [PAD.03X.05]  45.47,45.72 0 bottom
TP12  TEST-POINT3X5  [PAD.03X.05]  45.47,45.72 0 top
TP13  TEST-POINT3X5  [PAD.03X.05]  66.29,45.72 0 bottom
TP14  TEST-POINT3X5  [PAD.03X.05]  66.29,45.72 0 top
TP15  TEST-POINT3X5  [PAD.03X.05]  87.12,45.72 0 bottom
TP16  TEST-POINT3X5  [PAD.03X.05]  87.12,45.72 0 top
TP17  TEST-POINT3X5  [PAD.03X.05]  24.64,69.85 0 bottom
TP18  TEST-POINT3X5  [PAD.03X.05]  24.64,69.85 0 top
TP19  TEST-POINT3X5  [PAD.03X.05]  45.47,69.85 0 bottom
TP20  TEST-POINT3X5  [PAD.03X.05]  45.47,69.85 0 top
TP21  TEST-POINT3X5  [PAD.03X.05]  66.29,69.85 0 bottom
TP22  TEST-POINT3X5  [PAD.03X.05]  66.29,69.85 0 top
TP23  TEST-POINT3X5  [PAD.03X.05]  87.12,69.85 0 bottom
TP24  TEST-POINT3X5  [PAD.03X.05]  87.12,69.85 0 top
TP25  TEST-POINT3X5  [PAD.03X.05]  24.64,93.98 0 bottom
TP26  TEST-POINT3X5  [PAD.03X.05]  24.64,93.98 0 top
TP27  TEST-POINT3X5  [PAD.03X.05]  45.47,93.98 0 bottom
TP28  TEST-POINT3X5  [PAD.03X.05]  45.47,93.98 0 top
TP29  TEST-POINT3X5  [PAD.03X.05]  66.29,93.98 0 bottom
TP30  TEST-POINT3X5  [PAD.03X.05]  66.29,93.98 0 top
TP31  TEST-POINT3X5  [PAD.03X.05]  87.12,93.98 0 bottom
TP32  TEST-POINT3X5  [PAD.03X.05]  87.12,93.98 0 top

## Library data of the parts
C1-C96 R1-R32 SJ1-SJ80 TP1-TP32 = SparkFun-Passives
E$1 = SparkFun-Retired
E$4 E$8 FID1-FID32 LOGO1-LOGO48 = SparkFun-Aesthetics
JP1-JP32 = SparkFun-Connectors
OLED1-OLED16 = microView-temp

## Nets
BS1: OLED1.9 SJ1.2
BS2: OLED1.10 SJ2.2
BS3: OLED2.9 SJ8.2
BS4: OLED2.10 SJ9.2
BS5: OLED3.9 SJ13.2
BS6: OLED3.10 SJ14.2
BS7: OLED4.9 SJ18.2
BS8: OLED4.10 SJ19.2
BS9: OLED5.9 SJ23.2
BS10: OLED5.10 SJ24.2
BS11: OLED6.9 SJ28.2
BS12: OLED6.10 SJ29.2
BS13: OLED7.9 SJ33.2
BS14: OLED7.10 SJ34.2
BS15: OLED8.9 SJ38.2
BS16: OLED8.10 SJ39.2
BS17: OLED9.9 SJ43.2
BS18: OLED9.10 SJ44.2
BS19: OLED10.9 SJ48.2
BS20: OLED10.10 SJ49.2
BS21: OLED11.9 SJ53.2
BS22: OLED11.10 SJ54.2
BS23: OLED12.9 SJ58.2
BS24: OLED12.10 SJ59.2
BS25: OLED13.9 SJ63.2
BS26: OLED13.10 SJ64.2
BS27: OLED14.9 SJ68.2
BS28: OLED14.10 SJ69.2
BS29: OLED15.9 SJ73.2
BS30: OLED15.10 SJ74.2
BS31: OLED16.9 SJ78.2
BS32: OLED16.10 SJ79.2
C1N: C2.2 OLED1.5
C1N1: C8.2 OLED2.5
C1N2: C14.2 OLED3.5
C1N3: C20.2 OLED4.5
C1N4: C26.2 OLED5.5
C1N5: C32.2 OLED6.5
C1N6: C38.2 OLED7.5
C1N7: C44.2 OLED8.5
C1N8: C50.2 OLED9.5
C1N9: C56.2 OLED10.5
C1N10: C62.2 OLED11.5
C1N11: C68.2 OLED12.5
C1N12: C74.2 OLED13.5
C1N13: C80.2 OLED14.5
C1N14: C86.2 OLED15.5
C1N15: C92.2 OLED16.5
C1P: C2.1 OLED1.4
C1P1: C8.1 OLED2.4
C1P2: C14.1 OLED3.4
C1P3: C20.1 OLED4.4
C1P4: C26.1 OLED5.4
C1P5: C32.1 OLED6.4
C1P6: C38.1 OLED7.4
C1P7: C44.1 OLED8.4
C1P8: C50.1 OLED9.4
C1P9: C56.1 OLED10.4
C1P10: C62.1 OLED11.4
C1P11: C68.1 OLED12.4
C1P12: C74.1 OLED13.4
C1P13: C80.1 OLED14.4
C1P14: C86.1 OLED15.4
C1P15: C92.1 OLED16.4
C2N: C3.2 OLED1.3
C2N1: C9.2 OLED2.3
C2N2: C15.2 OLED3.3
C2N3: C21.2 OLED4.3
C2N4: C27.2 OLED5.3
C2N5: C33.2 OLED6.3
C2N6: C39.2 OLED7.3
C2N7: C45.2 OLED8.3
C2N8: C51.2 OLED9.3
C2N9: C57.2 OLED10.3
C2N10: C63.2 OLED11.3
C2N11: C69.2 OLED12.3
C2N12: C75.2 OLED13.3
C2N13: C81.2 OLED14.3
C2N14: C87.2 OLED15.3
C2N15: C93.2 OLED16.3
C2P: C3.1 OLED1.2
C2P1: C9.1 OLED2.2
C2P2: C15.1 OLED3.2
C2P3: C21.1 OLED4.2
C2P4: C27.1 OLED5.2
C2P5: C33.1 OLED6.2
C2P6: C39.1 OLED7.2
C2P7: C45.1 OLED8.2
C2P8: C51.1 OLED9.2
C2P9: C57.1 OLED10.2
C2P10: C63.1 OLED11.2
C2P11: C69.1 OLED12.2
C2P12: C75.1 OLED13.2
C2P13: C81.1 OLED14.2
C2P14: C87.1 OLED15.2
C2P15: C93.1 OLED16.2
CS: JP1.8 OLED1.11
CS1: JP4.8 OLED2.11
CS2: JP6.8 OLED3.11
CS3: JP8.8 OLED4.11
CS4: JP10.8 OLED5.11
CS5: JP12.8 OLED6.11
CS6: JP14.8 OLED7.11
CS7: JP16.8 OLED8.11
CS8: JP18.8 OLED9.11
CS9: JP20.8 OLED10.11
CS10: JP22.8 OLED11.11
CS11: JP24.8 OLED12.11
CS12: JP26.8 OLED13.11
CS13: JP28.8 OLED14.11
CS14: JP30.8 OLED15.11
CS15: JP32.8 OLED16.11
D0/SCK: JP1.4 OLED1.16
D0/SCK1: JP4.4 OLED2.16
D0/SCK2: JP6.4 OLED3.16
D0/SCK3: JP8.4 OLED4.16
D0/SCK4: JP10.4 OLED5.16
D0/SCK5: JP12.4 OLED6.16
D0/SCK6: JP14.4 OLED7.16
D0/SCK7: JP16.4 OLED8.16
D0/SCK8: JP18.4 OLED9.16
D0/SCK9: JP20.4 OLED10.16
D0/SCK10: JP22.4 OLED11.16
D0/SCK11: JP24.4 OLED12.16
D0/SCK12: JP26.4 OLED13.16
D0/SCK13: JP28.4 OLED14.16
D0/SCK14: JP30.4 OLED15.16
D0/SCK15: JP32.4 OLED16.16
D1: JP3.8 OLED2.23
D1/MOSI: JP1.3 OLED1.17 SJ5.1
D1/MOSI1: JP4.3 OLED2.17 SJ7.1
D1/MOSI2: JP6.3 OLED3.17 SJ12.1
D1/MOSI3: JP8.3 OLED4.17 SJ17.1
D1/MOSI4: JP10.3 OLED5.17 SJ22.1
D1/MOSI5: JP12.3 OLED6.17 SJ27.1
D1/MOSI6: JP14.3 OLED7.17 SJ32.1
D1/MOSI7: JP16.3 OLED8.17 SJ37.1
D1/MOSI8: JP18.3 OLED9.17 SJ42.1
D1/MOSI9: JP20.3 OLED10.17 SJ47.1
D1/MOSI10: JP22.3 OLED11.17 SJ52.1
D1/MOSI11: JP24.3 OLED12.17 SJ57.1
D1/MOSI12: JP26.3 OLED13.17 SJ62.1
D1/MOSI13: JP28.3 OLED14.17 SJ67.1
D1/MOSI14: JP30.3 OLED15.17 SJ72.1
D1/MOSI15: JP32.3 OLED16.17 SJ77.1
D2: JP1.5 OLED1.18 SJ5.2
D3: JP2.4 OLED1.19
D4: JP2.5 OLED1.20
D5: JP2.6 OLED1.21
D6: JP2.7 OLED1.22
D7: JP2.8 OLED1.23
D8: JP3.7 OLED2.22
D9: JP3.6 OLED2.21
D10: JP3.5 OLED2.20
D11: JP3.4 OLED2.19
D12: JP4.5 OLED2.18 SJ7.2
D13: JP5.8 OLED3.23
D14: JP5.7 OLED3.22
D15: JP5.6 OLED3.21
D16: JP5.5 OLED3.20
D17: JP5.4 OLED3.19
D18: JP6.5 OLED3.18 SJ12.2
D19: JP7.8 OLED4.23
D20: JP7.7 OLED4.22
D21: JP7.6 OLED4.21
D22: JP7.5 OLED4.20
D23: JP7.4 OLED4.19
D24: JP8.5 OLED4.18 SJ17.2
D25: JP9.8 OLED5.23
D26: JP9.7 OLED5.22
D27: JP9.6 OLED5.21
D28: JP9.5 OLED5.20
D29: JP9.4 OLED5.19
D30: JP10.5 OLED5.18 SJ22.2
D31: JP11.8 OLED6.23
D32: JP11.7 OLED6.22
D33: JP11.6 OLED6.21
D34: JP11.5 OLED6.20
D35: JP11.4 OLED6.19
D36: JP12.5 OLED6.18 SJ27.2
D37: JP13.8 OLED7.23
D38: JP13.7 OLED7.22
D39: JP13.6 OLED7.21
D40: JP13.5 OLED7.20
D41: JP13.4 OLED7.19
D42: JP14.5 OLED7.18 SJ32.2
D43: JP15.8 OLED8.23
D44: JP15.7 OLED8.22
D45: JP15.6 OLED8.21
D46: JP15.5 OLED8.20
D47: JP15.4 OLED8.19
D48: JP16.5 OLED8.18 SJ37.2
D49: JP17.8 OLED9.23
D50: JP17.7 OLED9.22
D51: JP17.6 OLED9.21
D52: JP17.5 OLED9.20
D53: JP17.4 OLED9.19
D54: JP18.5 OLED9.18 SJ42.2
D55: JP19.8 OLED10.23
D56: JP19.7 OLED10.22
D57: JP19.6 OLED10.21
D58: JP19.5 OLED10.20
D59: JP19.4 OLED10.19
D60: JP20.5 OLED10.18 SJ47.2
D61: JP21.8 OLED11.23
D62: JP21.7 OLED11.22
D63: JP21.6 OLED11.21
D64: JP21.5 OLED11.20
D65: JP21.4 OLED11.19
D66: JP22.5 OLED11.18 SJ52.2
D67: JP23.8 OLED12.23
D68: JP23.7 OLED12.22
D69: JP23.6 OLED12.21
D70: JP23.5 OLED12.20
D71: JP23.4 OLED12.19
D72: JP24.5 OLED12.18 SJ57.2
D73: JP25.8 OLED13.23
D74: JP25.7 OLED13.22
D75: JP25.6 OLED13.21
D76: JP25.5 OLED13.20
D77: JP25.4 OLED13.19
D78: JP26.5 OLED13.18 SJ62.2
D79: JP27.8 OLED14.23
D80: JP27.7 OLED14.22
D81: JP27.6 OLED14.21
D82: JP27.5 OLED14.20
D83: JP27.4 OLED14.19
D84: JP28.5 OLED14.18 SJ67.2
D85: JP29.8 OLED15.23
D86: JP29.7 OLED15.22
D87: JP29.6 OLED15.21
D88: JP29.5 OLED15.20
D89: JP29.4 OLED15.19
D90: JP30.5 OLED15.18 SJ72.2
D91: JP31.8 OLED16.23
D92: JP31.7 OLED16.22
D93: JP31.6 OLED16.21
D94: JP31.5 OLED16.20
D95: JP31.4 OLED16.19
D96: JP32.5 OLED16.18 SJ77.2
D/C: JP1.6 OLED1.13 SJ4.2
D/C1: JP4.6 OLED2.13 SJ10.2
D/C2: JP6.6 OLED3.13 SJ15.2
D/C3: JP8.6 OLED4.13 SJ20.2
D/C4: JP10.6 OLED5.13 SJ25.2
D/C5: JP12.6 OLED6.13 SJ30.2
D/C6: JP14.6 OLED7.13 SJ35.2
D/C7: JP16.6 OLED8.13 SJ40.2
D/C8: JP18.6 OLED9.13 SJ45.2
D/C9: JP20.6 OLED10.13 SJ50.2
D/C10: JP22.6 OLED11.13 SJ55.2
D/C11: JP24.6 OLED12.13 SJ60.2
D/C12: JP26.6 OLED13.13 SJ65.2
D/C13: JP28.6 OLED14.13 SJ70.2
D/C14: JP30.6 OLED15.13 SJ75.2
D/C15: JP32.6 OLED16.13 SJ80.2
GND: C1.2 C4.2 C5.2 C6.2 JP1.1 OLED1.1 OLED1.7 OLED1.27 OLED1.28 R1.1 SJ1.3 SJ2.3 SJ4.3
GND1: C7.2 C10.2 C11.2 C12.2 JP4.1 OLED2.1 OLED2.7 OLED2.27 OLED2.28 R3.1 SJ8.3 SJ9.3 SJ10.3
GND2: C13.2 C16.2 C17.2 C18.2 JP6.1 OLED3.1 OLED3.7 OLED3.27 OLED3.28 R5.1 SJ13.3 SJ14.3 SJ15.3
GND3: C19.2 C22.2 C23.2 C24.2 JP8.1 OLED4.1 OLED4.7 OLED4.27 OLED4.28 R7.1 SJ18.3 SJ19.3 SJ20.3
GND4: C25.2 C28.2 C29.2 C30.2 JP10.1 OLED5.1 OLED5.7 OLED5.27 OLED5.28 R9.1 SJ23.3 SJ24.3 SJ25.3
GND5: C31.2 C34.2 C35.2 C36.2 JP12.1 OLED6.1 OLED6.7 OLED6.27 OLED6.28 R11.1 SJ28.3 SJ29.3 SJ30.3
GND6: C37.2 C40.2 C41.2 C42.2 JP14.1 OLED7.1 OLED7.7 OLED7.27 OLED7.28 R13.1 SJ33.3 SJ34.3 SJ35.3
GND7: C43.2 C46.2 C47.2 C48.2 JP16.1 OLED8.1 OLED8.7 OLED8.27 OLED8.28 R15.1 SJ38.3 SJ39.3 SJ40.3
GND8: C49.2 C52.2 C53.2 C54.2 JP18.1 OLED9.1 OLED9.7 OLED9.27 OLED9.28 R17.1 SJ43.3 SJ44.3 SJ45.3
GND9: C55.2 C58.2 C59.2 C60.2 JP20.1 OLED10.1 OLED10.7 OLED10.27 OLED10.28 R19.1 SJ48.3 SJ49.3 SJ50.3
GND10: C61.2 C64.2 C65.2 C66.2 JP22.1 OLED11.1 OLED11.7 OLED11.27 OLED11.28 R21.1 SJ53.3 SJ54.3 SJ55.3
GND11: C67.2 C70.2 C71.2 C72.2 JP24.1 OLED12.1 OLED12.7 OLED12.27 OLED12.28 R23.1 SJ58.3 SJ59.3 SJ60.3
GND12: C73.2 C76.2 C77.2 C78.2 JP26.1 OLED13.1 OLED13.7 OLED13.27 OLED13.28 R25.1 SJ63.3 SJ64.3 SJ65.3
GND13: C79.2 C82.2 C83.2 C84.2 JP28.1 OLED14.1 OLED14.7 OLED14.27 OLED14.28 R27.1 SJ68.3 SJ69.3 SJ70.3
GND14: C85.2 C88.2 C89.2 C90.2 JP30.1 OLED15.1 OLED15.7 OLED15.27 OLED15.28 R29.1 SJ73.3 SJ74.3 SJ75.3
GND15: C91.2 C94.2 C95.2 C96.2 JP32.1 OLED16.1 OLED16.7 OLED16.27 OLED16.28 R31.1 SJ78.3 SJ79.3 SJ80.3
IREF: OLED1.24 R1.2
IREF1: OLED2.24 R3.2
IREF2: OLED3.24 R5.2
IREF3: OLED4.24 R7.2
IREF4: OLED5.24 R9.2
IREF5: OLED6.24 R11.2
IREF6: OLED7.24 R13.2
IREF7: OLED8.24 R15.2
IREF8: OLED9.24 R17.2
IREF9: OLED10.24 R19.2
IREF10: OLED11.24 R21.2
IREF11: OLED12.24 R23.2
IREF12: OLED13.24 R25.2
IREF13: OLED14.24 R27.2
IREF14: OLED15.24 R29.2
IREF15: OLED16.24 R31.2
RD/E: JP2.3 OLED1.15
RD/E1: JP3.3 OLED2.15
RD/E2: JP5.3 OLED3.15
RD/E3: JP7.3 OLED4.15
RD/E4: JP9.3 OLED5.15
RD/E5: JP11.3 OLED6.15
RD/E6: JP13.3 OLED7.15
RD/E7: JP15.3 OLED8.15
RD/E8: JP17.3 OLED9.15
RD/E9: JP19.3 OLED10.15
RD/E10: JP21.3 OLED11.15
RD/E11: JP23.3 OLED12.15
RD/E12: JP25.3 OLED13.15
RD/E13: JP27.3 OLED14.15
RD/E14: JP29.3 OLED15.15
RD/E15: JP31.3 OLED16.15
RESET: JP1.7 OLED1.12
RESET1: JP4.7 OLED2.12
RESET2: JP6.7 OLED3.12
RESET3: JP8.7 OLED4.12
RESET4: JP10.7 OLED5.12
RESET5: JP12.7 OLED6.12
RESET6: JP14.7 OLED7.12
RESET7: JP16.7 OLED8.12
RESET8: JP18.7 OLED9.12
RESET9: JP20.7 OLED10.12
RESET10: JP22.7 OLED11.12
RESET11: JP24.7 OLED12.12
RESET12: JP26.7 OLED13.12
RESET13: JP28.7 OLED14.12
RESET14: JP30.7 OLED15.12
RESET15: JP32.7 OLED16.12
VBAT: C6.1 JP2.1 OLED1.6 SJ3.1
VBAT1: C12.1 JP3.1 OLED2.6 SJ6.1
VBAT2: C18.1 JP5.1 OLED3.6 SJ11.1
VBAT3: C24.1 JP7.1 OLED4.6 SJ16.1
VBAT4: C30.1 JP9.1 OLED5.6 SJ21.1
VBAT5: C36.1 JP11.1 OLED6.6 SJ26.1
VBAT6: C42.1 JP13.1 OLED7.6 SJ31.1
VBAT7: C48.1 JP15.1 OLED8.6 SJ36.1
VBAT8: C54.1 JP17.1 OLED9.6 SJ41.1
VBAT9: C60.1 JP19.1 OLED10.6 SJ46.1
VBAT10: C66.1 JP21.1 OLED11.6 SJ51.1
VBAT11: C72.1 JP23.1 OLED12.6 SJ56.1
VBAT12: C78.1 JP25.1 OLED13.6 SJ61.1
VBAT13: C84.1 JP27.1 OLED14.6 SJ66.1
VBAT14: C90.1 JP29.1 OLED15.6 SJ71.1
VBAT15: C96.1 JP31.1 OLED16.6 SJ76.1
VCC: C1.1 OLED1.26 TP1.P$1 TP2.P$1
VCC1: C7.1 OLED2.26 TP3.P$1 TP4.P$1
VCC2: C13.1 OLED3.26 TP5.P$1 TP6.P$1
VCC3: C19.1 OLED4.26 TP7.P$1 TP8.P$1
VCC4: C25.1 OLED5.26 TP9.P$1 TP10.P$1
VCC5: C31.1 OLED6.26 TP11.P$1 TP12.P$1
VCC6: C37.1 OLED7.26 TP13.P$1 TP14.P$1
VCC7: C43.1 OLED8.26 TP15.P$1 TP16.P$1
VCC8: C49.1 OLED9.26 TP17.P$1 TP18.P$1
VCC9: C55.1 OLED10.26 TP19.P$1 TP20.P$1
VCC10: C61.1 OLED11.26 TP21.P$1 TP22.P$1
VCC11: C67.1 OLED12.26 TP23.P$1 TP24.P$1
VCC12: C73.1 OLED13.26 TP25.P$1 TP26.P$1
VCC13: C79.1 OLED14.26 TP27.P$1 TP28.P$1
VCC14: C85.1 OLED15.26 TP29.P$1 TP30.P$1
VCC15: C91.1 OLED16.26 TP31.P$1 TP32.P$1
VCOMH: C5.1 OLED1.25
VCOMH1: C11.1 OLED2.25
VCOMH2: C17.1 OLED3.25
VCOMH3: C23.1 OLED4.25
VCOMH4: C29.1 OLED5.25
VCOMH5: C35.1 OLED6.25
VCOMH6: C41.1 OLED7.25
VCOMH7: C47.1 OLED8.25
VCOMH8: C53.1 OLED9.25
VCOMH9: C59.1 OLED10.25
VCOMH10: C65.1 OLED11.25
VCOMH11: C71.1 OLED12.25
VCOMH12: C77.1 OLED13.25
VCOMH13: C83.1 OLED14.25
VCOMH14: C89.1 OLED15.25
VCOMH15: C95.1 OLED16.25
VDD: C4.1 JP1.2 OLED1.8 R2.2 SJ3.2
VDD1: C10.1 JP4.2 OLED2.8 R4.2 SJ6.2
VDD2: C16.1 JP6.2 OLED3.8 R6.2 SJ11.2
VDD3: C22.1 JP8.2 OLED4.8 R8.2 SJ16.2
VDD4: C28.1 JP10.2 OLED5.8 R10.2 SJ21.2
VDD5: C34.1 JP12.2 OLED6.8 R12.2 SJ26.2
VDD6: C40.1 JP14.2 OLED7.8 R14.2 SJ31.2
VDD7: C46.1 JP16.2 OLED8.8 R16.2 SJ36.2
VDD8: C52.1 JP18.2 OLED9.8 R18.2 SJ41.2
VDD9: C58.1 JP20.2 OLED10.8 R20.2 SJ46.2
VDD10: C64.1 JP22.2 OLED11.8 R22.2 SJ51.2
VDD11: C70.1 JP24.2 OLED12.8 R24.2 SJ56.2
VDD12: C76.1 JP26.2 OLED13.8 R26.2 SJ61.2
VDD13: C82.1 JP28.2 OLED14.8 R28.2 SJ66.2
VDD14: C88.1 JP30.2 OLED15.8 R30.2 SJ71.2
VDD15: C94.1 JP32.2 OLED16.8 R32.2 SJ76.2
VDD_PU: R2.1 SJ1.1 SJ2.1 SJ4.1
VDD_PU1: R4.1 SJ8.1 SJ9.1 SJ10.1
VDD_PU2: R6.1 SJ13.1 SJ14.1 SJ15.1
VDD_PU3: R8.1 SJ18.1 SJ19.1 SJ20.1
VDD_PU4: R10.1 SJ23.1 SJ24.1 SJ25.1
VDD_PU5: R12.1 SJ28.1 SJ29.1 SJ30.1
VDD_PU6: R14.1 SJ33.1 SJ34.1 SJ35.1
VDD_PU7: R16.1 SJ38.1 SJ39.1 SJ40.1
VDD_PU8: R18.1 SJ43.1 SJ44.1 SJ45.1
VDD_PU9: R20.1 SJ48.1 SJ49.1 SJ50.1
VDD_PU10: R22.1 SJ53.1 SJ54.1 SJ55.1
VDD_PU11: R24.1 SJ58.1 SJ59.1 SJ60.1
VDD_PU12: R26.1 SJ63.1 SJ64.1 SJ65.1
VDD_PU13: R28.1 SJ68.1 SJ69.1 SJ70.1
VDD_PU14: R30.1 SJ73.1 SJ74.1 SJ75.1
VDD_PU15: R32.1 SJ78.1 SJ79.1 SJ80.1
WR/RW: JP2.2 OLED1.14
WR/RW1: JP3.2 OLED2.14
WR/RW2: JP5.2 OLED3.14
WR/RW3: JP7.2 OLED4.14
WR/RW4: JP9.2 OLED5.14
WR/RW5: JP11.2 OLED6.14
WR/RW6: JP13.2 OLED7.14
WR/RW7: JP15.2 OLED8.14
WR/RW8: JP17.2 OLED9.14
WR/RW9: JP19.2 OLED10.14
WR/RW10: JP21.2 OLED11.14
WR/RW11: JP23.2 OLED12.14
WR/RW12: JP25.2 OLED13.14
WR/RW13: JP27.2 OLED14.14
WR/RW14: JP29.2 OLED15.14
WR/RW15: JP31.2 OLED16.14